# EAGLE board openSX70-dongle_SEEED_v5 (EAGLE 9.1.0)
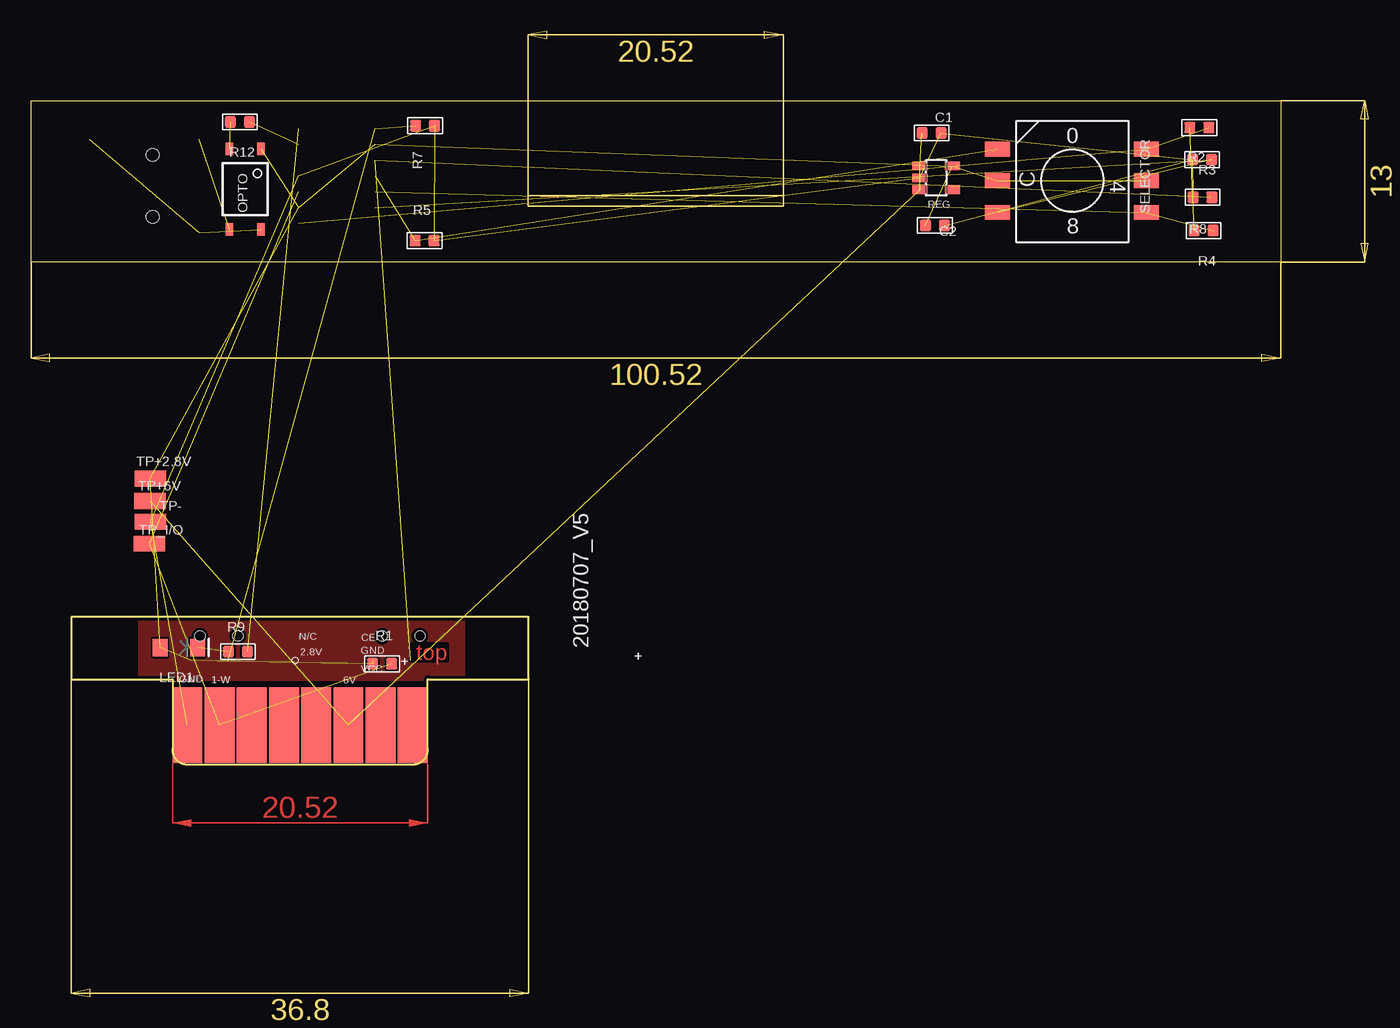
[diagram p0: board, top side]
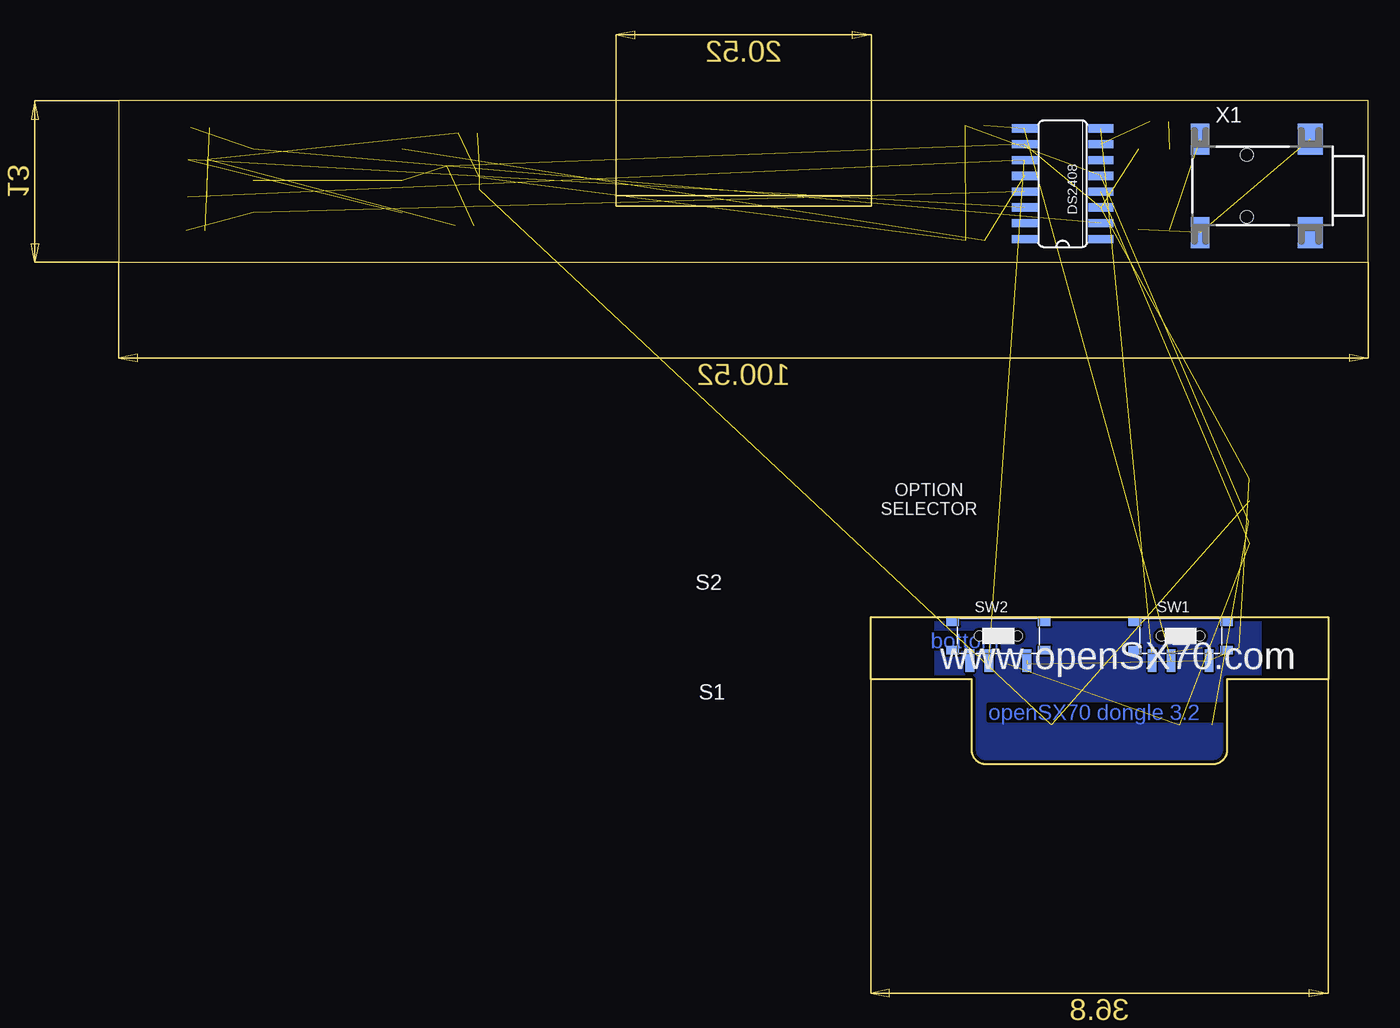
[diagram p1: board, bottom side, seen from below]

Size 100.52 x 53.38 mm. Coordinates in mm from the lower left corner, seen from the top.
Outline: 31.92,6.71 31.9,6.83
Outline: 31.9,6.83 31.9,1.24 arc-90 30.89,0 12.39,0 arc-90 11.38,1.24 11.38,6.83 3.24,6.83 3.24,11.83 40.04,11.83 40.04,6.83 31.9,6.83
Outline: 40,45.73 60.52,45.73
Outline: 60.52,45.73 60.52,44.88
Outline: 60.52,44.88 40,44.88
Outline: 40,44.88 40,45.73
Outline: 40,44.88 60.52,44.88
Outline: 60.52,44.88 60.52,45.73
Outline: 60.52,45.73 40,45.73
Outline: 40,45.73 40,44.88
Outline: 0,53.38 100.52,53.38 100.52,40.38 0,40.38 0,53.38
Copper layers (1*16): Top 0.035mm / dielectric 1.5mm / Bottom 0.035mm
Design rules "SeeedStudio_2layer_DRU_no_angle_20140221": minimum track width 6mil, minimum drill 12mil, track to track 6mil, track to pad 6mil, pad to pad 6mil, via to via 6mil, smd to smd 0mil, copper to edge 10mil, drill to drill 10mil, minimum pad ring 10mil, minimum via ring 6mil, stop-mask expansion 2mil, vias tented up to drill 100mil, thermal gap 10mil
Net classes: 0 GND: width 0.305 mm; 1 VCC: width 0.254 mm; 2 2.8V: width 0.254 mm

## Footprints (pad centres in the part's own frame; a part is rotated, then mirrored left to right if it is on the bottom)
C0603 = smd 0.889 x 0.889: 1 0,0.762; 2 0,-0.762
SO16 = smd 0.66 x 2.032: 1 -4.445,-3.073; 2 -3.175,-3.073; 3 -1.905,-3.073; 4 -0.635,-3.073; 5 0.635,-3.073; 6 1.905,-3.073; 7 3.175,-3.073; 8 4.445,-3.073; 9 4.445,3.073; 10 3.175,3.073; 11 1.905,3.073; 12 0.635,3.073; 13 -0.635,3.073; 14 -1.905,3.073; 15 -3.175,3.073; 16 -4.445,3.073
LED-1206 = smd 1.2 x 1.4: A -1.5,0; C 1.5,0
SO-4 = smd 1 x 0.6: 1 -3.24,0.635; 2 -3.24,-1.905; 3 3.24,-1.905; 4 3.24,0.635
R0603 = smd 0.889 x 0.889: 1 0,0.762; 2 0,-0.762
SOT-23-5 = smd 0.69 x 1.2: 1 -0.95,-1.3; 2 0,-1.3; 3 0.95,-1.3; 4 0.95,1.3; 5 -0.95,1.3
CTS221AMX16 = smd 2 x 1.2: 1 -6.04,2.54; 2 5.96,-2.54; 4 -6.04,-2.54; 8 5.96,2.54; C -6.04,0; C2 5.96,0; P$2 -6.04,2.54; P$3 -6.04,-2.54
SW7-SMD-L6.7X2.7X3.2MM = smd 1.8 x 0.7: A 1.978,2.286; B 1.978,-2.286; COM 1.978,-0.762 | smd 0.7 x 1.016: SS1 -1.15,-3.683; SS2 1.15,-3.683; SS3 1.15,3.683; SS4 -1.15,3.683 | hole 0.813: 0,-1.524; 0,1.524
SMD1,27-2,54 = smd 1.27 x 2.54: 1 0,0
FLASH-EDGE-8 = smd 2.4 x 6.09: P$1 -9.065,0; P$2 -6.475,0; P$3 -3.885,0; P$4 -1.295,0; P$5 1.295,0; P$6 3.885,0; P$7 6.475,0; P$8 9.065,0
1503_02 = smd 2.5 x 1.5: 1 -3.75,-10.75; 3 3.75,-10.75 | smd 2.5 x 2: 2 -3.75,-1.9; 2@2 3.75,-1.9 | hole 1: -2.5,-7; 2.5,-7

## Placement (x,y rotation side)
C1  1uf  [C0603]  72.45,50.78 90 top
C2  1uf  [C0603]  72.72,43.35 90 top
DS2408  DS2408  [SO16]  24.59,46.7 90 bottom
LED1  Yellow  [LED-1206]  11.89,9.39 0 top
OPTO  TLP127  [SO-4]  17.87,46.26 270 top
R1  4.7K  [R0603]  28.24,8.08 270 top
R2  100K  [R0603]  93.98,51.2 270 top
R3  100K  [R0603]  94.2,48.63 90 top
R4  100K  [R0603]  94.33,42.94 90 top
R5  100K  [R0603]  31.65,42.12 270 top
R7  100K  [R0603]  31.69,51.36 90 top
R8  100K  [R0603]  94.24,45.61 270 top
R9  220R  [R0603]  16.64,9.05 270 top
R12  220R  [R0603]  16.81,51.68 270 top
REG  NCP4688  [SOT-23-5]  72.81,47.18 270 top
SELECTOR  CTS221AMX16  [CTS221AMX16]  83.77,46.94 0 top
SW1  MK-12C02 G1.5  [SW7-SMD-L6.7X2.7X3.2MM]  15.11,10.32 270 bottom
SW2  MK-12C02 G1.5  [SW7-SMD-L6.7X2.7X3.2MM]  29.77,10.32 270 bottom
TP+2.8V  [SMD1,27-2,54]  9.6,22.99 90 top
TP+6V  [SMD1,27-2,54]  9.57,21.18 90 top
TP-  [SMD1,27-2,54]  9.61,19.51 90 top
TP_I/O  [SMD1,27-2,54]  9.54,17.74 90 top
U$1  FLASH-EDGE-CONNECTOR  [FLASH-EDGE-8]  21.64,3.15 0 top
X1  1503_02  [1503_02]  2.79,46.53 270 bottom

## Library data of the parts
C1 C2 = Seeed-Capacitor; MPN: CC0603KRX7R8BB105
DS2408 = DS2408-joaco
LED1 = SparkFun-LED; PROD_ID: DIO-09909
OPTO REG SELECTOR = openSX70
R1 = Seeed-Resistor; MPN: RC0603JR-074K7L
R2-R5 R7 R8 = Seeed-Resistor; MPN: RC0603FR-07100KL
R9 R12 = Seeed-Resistor; MPN: RC0603JR-07220RL
SW1 SW2 = Seeed-Switch; MPN: MK-12C02 G1.5
TP+2.8V TP+6V TP- TP_I/O = wirepad
U$1 = SX70-flash
X1 = con-lumberg; OC_FARNELL: 1216979; OC_NEWARK: unknown

## Nets
2.8V: C2.1 DS2408.3 DS2408.10 LED1.A OPTO.1 R1.2 REG.5 SELECTOR.C SELECTOR.C2 SW1.A SW2.A TP+2.8V.1
GND: C1.2 C2.2 DS2408.5 R2.2 R3.1 R4.1 R5.1 R7.2 R8.2 REG.2 TP-.1 U$1.P$1
N$1: DS2408.4 R1.1 TP_I/O.1 U$1.P$2
N$2: LED1.C R9.2
N$3: DS2408.2 R2.1 SELECTOR.8
N$4: DS2408.14 R3.2 SELECTOR.4
N$5: DS2408.13 R4.2 SELECTOR.2
N$6: DS2408.11 R8.1 SW2.COM
N$7: DS2408.9 R7.1 SW1.COM
N$8: DS2408.8 R9.1
N$9: OPTO.4 X1.2 X1.3
N$10: OPTO.2 R12.2
N$11: DS2408.7 R12.1
N$13: DS2408.12 R5.2 SELECTOR.1
N$15: OPTO.3 X1.1
VCC: C1.1 REG.1 REG.3 TP+6V.1 U$1.P$6

## Tracks (layer width: path | path; a pad name or v marks a point on that pad's centre or on a via)
2.8V  (11 unrouted)
GND  (11 unrouted)
  pour Top: 8.69,11.79 34.85,11.84 34.85,6.76 8.69,6.71
  pour Bottom: 8.69,11.88 8.69,6.71 11.23,6.71 11.23,0.36 31.55,0.36 31.55,6.71 34.82,6.66 34.82,11.83
N$1  (3 unrouted)
N$2  (1 unrouted)
N$3  (2 unrouted)
N$4  (2 unrouted)
N$5  (2 unrouted)
N$6  (2 unrouted)
N$7  (2 unrouted)
N$8  (1 unrouted)
N$9  (2 unrouted)
N$10  (1 unrouted)
N$11  (1 unrouted)
N$13  (2 unrouted)
N$15  (1 unrouted)
VCC  (4 unrouted)
(copper drawn outside any net)
  shapes: Top area x1

## Text on the board
Top: top
Bottom: bottom | openSX70 dongle 3.2
tPlace: 20180707_V5 | + | +
bPlace: www.openSX70.com
tNames: N/C | CE | 2.8V | GND | VCC | GND | 1-W | 6V
bNames: OPTION / SELECTOR | S2 | S1